# Allegro board rasp_pi_shield_populated.brd
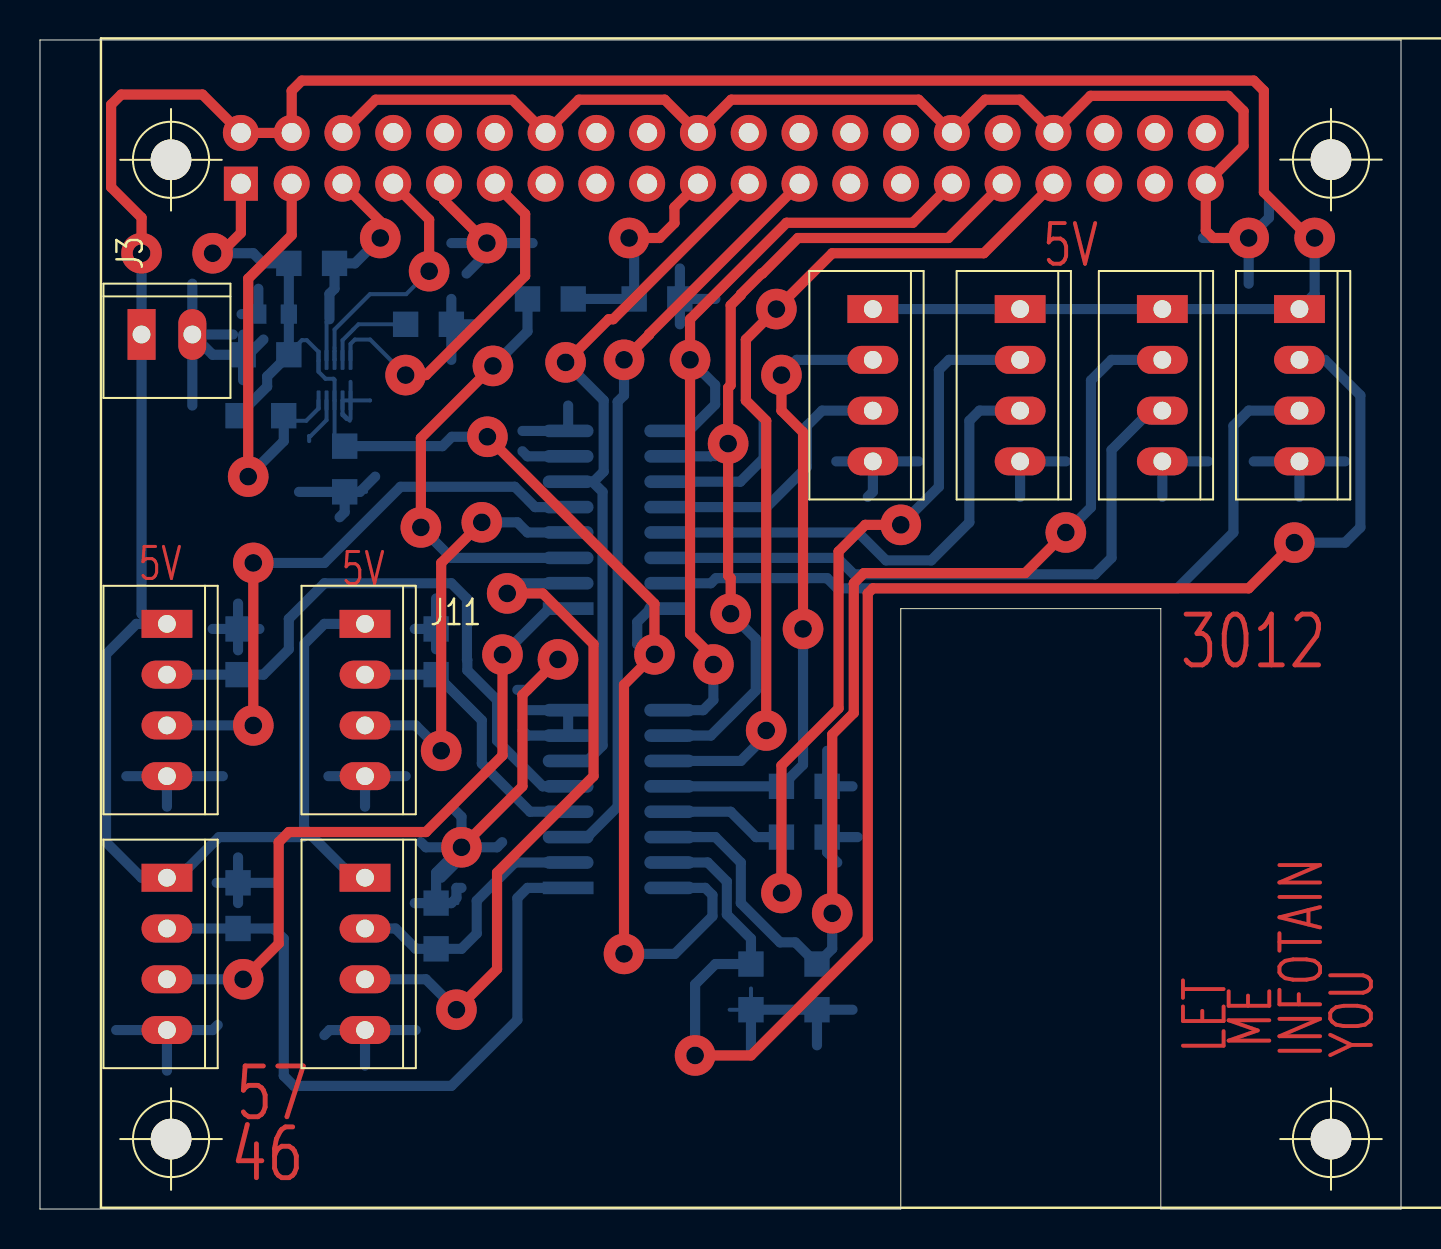
[diagram p0: board, top side]
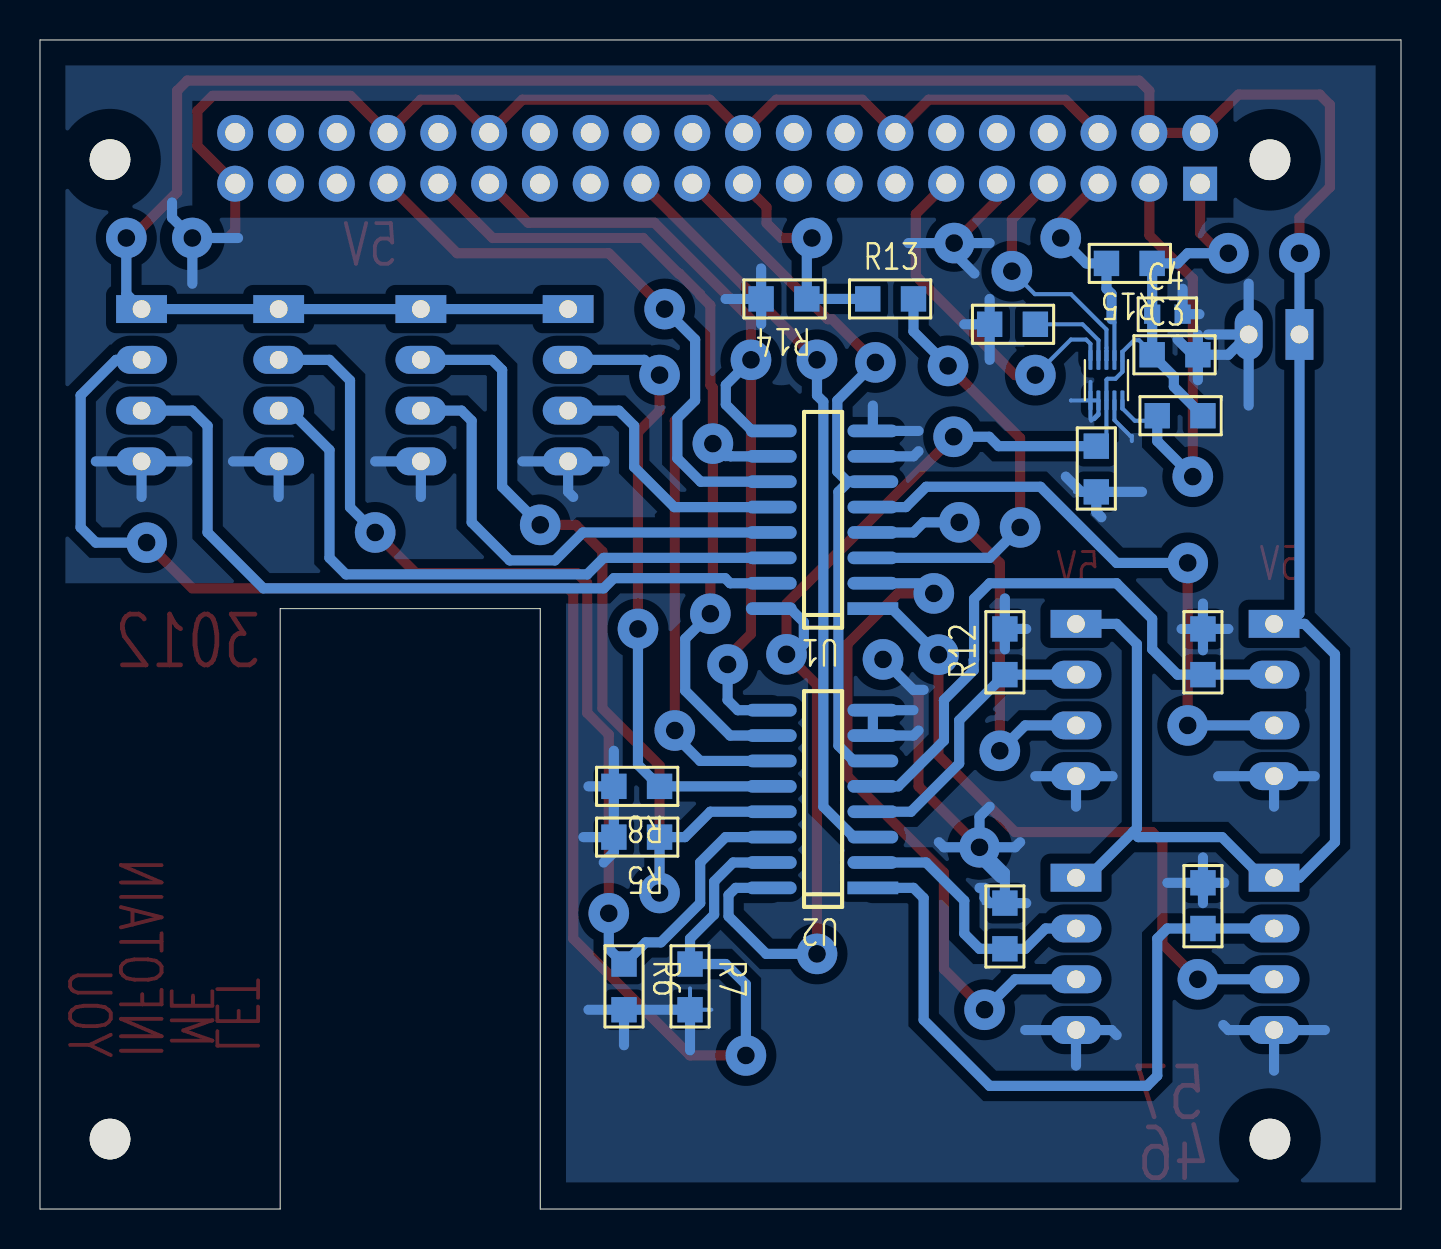
[diagram p1: board, bottom side, seen from below]

Outline 68.07 x 58.48 mm; copper layers: TOP, BOTTOM. Coordinates in mm from the lower left corner of the outline.
Outline path: 0,58.48 0,0 43.05,0 43.05,30.04 56.06,30.04 56.06,0 68.07,0 68.07,58.48 0,58.48

## Design rules (mm)
constraint set DEFAULT: min track width 0.198

## Placement (name value [footprint] x y rotation side)
C2  0.1u  [GU-C0805]  15.24 38.16 270 bottom
C3  0.1u  [GU-C0805]  12.45 42.74 180 bottom
C4  1u  [GU-C0603]  12.45 44.77 180 bottom
C5  0.1u  [GU-C0805]  18.29 44.26 0 bottom
J3  CONN FLEX 2  [GU-MOLEX2]  5.08 43.75 90 top
J4  CONN FLEX 4  [GU-MOLEX4]  49.02 45.02 0 top
J5  CONN FLEX 4  [GU-MOLEX4]  56.13 45.02 0 top
J6  CONN FLEX 4  [GU-MOLEX4]  62.99 45.02 0 top
J7  CONN FLEX 4  [GU-MOLEX4]  41.66 45.02 0 top
J8  CONN FLEX 4  [GU-MOLEX4]  6.35 16.57 0 top
J9  CONN FLEX 4  [GU-MOLEX4]  6.35 29.27 0 top
J10  CONN FLEX 4  [GU-MOLEX4]  16.26 16.57 0 top
J11  CONN FLEX 4  [GU-MOLEX4]  16.26 29.27 0 top
NOREF  -  [unnamed]  64.57 52.5 0 top
NOREF#2  -  [unnamed]  64.57 3.5 0 top
NOREF#3  -  [unnamed]  6.55 52.49 0 top
NOREF#4  -  [unnamed]  6.56 3.5 0 top
R5  10k  [GU-R0805]  37.08 18.61 0 bottom
R6  10k  [GU-R0805]  38.86 12.26 270 bottom
R7  10k  [GU-R0805]  35.56 12.26 270 bottom
R8  10k  [GU-R0805]  37.08 21.15 0 bottom
R9  10k  [GU-R0805]  9.91 14.03 90 bottom
R10  10k  [GU-R0805]  9.91 26.73 90 bottom
R11  10k  [GU-R0805]  19.81 13.02 90 bottom
R12  10k  [GU-R0805]  19.81 26.73 90 bottom
R13  1k  [GU-R0805]  26.67 45.53 180 bottom
R14  2k  [GU-R0805]  29.72 45.53 0 bottom
R15  1k  [GU-R0805]  12.45 47.31 0 bottom
R16  1k  [GU-R0805]  9.91 39.69 0 bottom
U1  4051  [GU-SOIC16]  26.42 30.04 90 bottom
U2  4051  [GU-SOIC16]  26.42 16.07 90 bottom
U3  RPI Connector  [GU-RASP-PI-3]  3.05 0.06 0 top
U4  MMA8652FCR1  [SON10P40_200X200X100L40X20]  14.73 41.47 0 bottom

## Library data of the parts
C2-C5 = C
J3 = CONN FLEX 2
J4-J11 = CONN FLEX 4
R5-R16 = R
U1 U2 = 4051_1
U3 = RPI Connector_2
U4 = MMA8652FCR1

## Footprints (pads in the part's own frame, mm; a bottom-side part is the same pattern mirrored in y, then rotated)
GU-C0603
  rect 0.813x0.965 smd: 1(0,0) 2(1.524,0)
GU-C0805
  rect 1.27x1.27 smd: 1(0,0) 2(2.286,0)
GU-MOLEX2
  rect 2.54x1.397 hole 0.889: 1(0,0)
  oval 2.54x1.397 hole 0.889: 2(0,-2.54)
GU-MOLEX4
  rect 2.54x1.397 hole 0.889: 1(0,0)
  oval 2.54x1.397 hole 0.889: 2(0,-2.54) 3(0,-5.08) 4(0,-7.62)
GU-R0805
  rect 1.27x1.27 smd: 1(0,0) 2(2.286,0)
GU-RASP-PI-3
  round 1 hole 3 unplated: (3.5,52.5) (3.5,3.5) (61.5,52.5) (61.5,3.5)
  rect 1.7x1.7 hole 1: 1(7,51.23)
  round 1.8 hole 1: 2(7,53.77) 3(9.54,51.23) 4(9.54,53.77) 5(12.08,51.23) 6(12.08,53.77) 7(14.62,51.23) 8(14.62,53.77) 9(17.16,51.23) 10(17.16,53.77) 11(19.7,51.23) 12(19.7,53.77) 13(22.24,51.23) 14(22.24,53.77) 15(24.78,51.23) 16(24.78,53.77) 17(27.32,51.23) 18(27.32,53.77) 19(29.86,51.23) 20(29.86,53.77) 21(32.4,51.23) 22(32.4,53.77) 23(34.94,51.23) 24(34.94,53.77) 25(37.48,51.23) 26(37.48,53.77) 27(40.02,51.23) 28(40.02,53.77) 29(42.56,51.23) 30(42.56,53.77) 31(45.1,51.23) 32(45.1,53.77) 33(47.64,51.23) 34(47.64,53.77) 35(50.18,51.23) 36(50.18,53.77) 37(52.72,51.23) 38(52.72,53.77) 39(55.26,51.23) 40(55.26,53.77)
GU-SOIC16
  rect 0.635x2.54 smd: 1(0,0)
  oval 0.635x2.54 smd: 2(1.27,0) 3(2.54,0) 4(3.81,0) 5(5.08,0) 6(6.35,0) 7(7.62,0) 8(8.89,0) 9(8.89,5.08) 10(7.62,5.08) 11(6.35,5.08) 12(5.08,5.08) 13(3.81,5.08) 14(2.54,5.08) 15(1.27,5.08) 16(0,5.08)
SON10P40_200X200X100L40X20
  rrect 0.2x1.1 smd: 1(-0.8,-0.965)
  rrect 0.2x1 smd: 2(-0.4,-1.015) 3(0,-1.015) 4(0.4,-1.015) 5(0.8,-1.015) 6(0.8,1.015) 7(0.4,1.015) 8(0,1.015) 9(-0.4,1.015) 10(-0.8,1.015)
unnamed
  round 2.032 hole 3.962 unplated: (0,0)

## Nets
3V3_: C2.1 C3.1 C4.1 R15.1 R16.1 U1.16 U2.16 U3.1 U4.1 U4.8(VDDIO)
5V_: J3.1 J4.1 J5.1 J6.1 J7.1 J8.1 J9.1 J10.1 J11.1 U3.2 U3.4
GND_: C2.2 C3.2 C4.2 C5.2 J3.2 J4.4 J5.4 J6.4 J7.4 J8.4 J9.4 J10.4 J11.4 R5.2 R6.2 R7.2 R8.2 R9.2 R10.2 R11.2 R12.2 R14.2 U1.7 U1.8 U2.7 U2.8 U3.6 U3.9 U3.14 U3.20 U3.30 U3.34 U3.39 U4.6 U4.7 U4.9
ACC_INT1: U3.7 U4.3
ACC_INT2: U3.11 U4.5
ACC_SCL: R15.2 U3.5 U4.2
ACC_SDA: R16.2 U3.3 U4.10
E0: J4.3 U1.13
E1: J5.3 U1.14
E2: J6.3 U1.15
E3: J7.3 U1.12
E4: J8.3 U1.1
E5: J9.3 U1.5
E6: J10.3 U1.2
E7: J11.3 U1.4(X7)
MUX_ECHO: R13.1 R14.1 U3.19
MUX_NEN: U1.6 U2.6 U3.21
MUX_S0: U1.11 U2.11 U3.33
MUX_S1: U1.10 U2.10 U3.31
MUX_S2: U1.9 U2.9 U3.29
MUX_TRIGGER: U2.3 U3.23
T0: J4.2 R5.1 U2.13
T1: J5.2 R6.1 U2.14
T2: J6.2 R7.1 U2.15
T3: J7.2 R8.1 U2.12
T4: J8.2 R9.1 U2.1
T5: J9.2 R10.1 U2.5
T6: J10.2 R11.1 U2.2
T7: J11.2 R12.1 U2.4(X7)
N001297: R13.2 U1.3
N26225: C5.1 U4.4

Pads without a net: U3 8 10 12 13 15 16 17 18 22 24 25 26 27 28 32 35 36 37 38 40

## Via types
v1: diameter 2.032, hole 0.889, TOP to BOTTOM, 41 vias

## Routing (per net, layer and track width the routed paths; a pad name or vN(x,y) marks a point on that pad's centre or on a via; arc(x,y) is an arc through that point)
3V3_: length 74.4
  TOP w0.508: v1(29.21,12.76) 29.21,26.23 v1(30.73,27.75) 30.73,30.28 v1(22.38,38.63) ; v1(8.64,47.82) 9.03,47.82 10.05,48.83 U3.1
  BOTTOM w0.198: U4.8 14.73,38.67 C2.1
  BOTTOM w0.203: U4.8 14.73,41.48 14.68,41.53 14.28,41.53 13.93,41.89 U4.1 13.93,42.88 13.35,43.46 13.1,43.46 12.45,42.81
  BOTTOM w0.508: U1.16 30.54,30.04 29.87,29.36 29.87,28.26 30.38,27.75 v1(30.73,27.75) ; U2.16 33.27,16.07 33.63,15.71 33.63,14.65 31.75,12.76 v1(29.21,12.76) ; C2.1 20.13,38.16 20.6,38.63 v1(22.38,38.63) ; R16.1 11.36,41.14 11.36,41.65 C3.1 C4.1 R15.1 11.18,47.31 10.67,47.82 v1(8.64,47.82)
5V_: length 163.4
  TOP w0.508: v1(5.08,47.82) 5.08,49.59 3.56,51.12 3.56,55.25 4.06,55.75 8.13,55.75 U3.2 U3.4 12.59,55.94 13.1,56.45 60.71,56.45 61.21,55.94 61.21,50.86 63.5,48.58 v1(63.75,48.58)
  BOTTOM w0.508: J10.1 15.68,16.57 13.4,18.86 ; v1(63.75,48.58) 63.75,45.78 J6.1 J5.1 J4.1 J7.1 ; 13.4,18.86 13.21,19.05 13.21,28.26 14.22,29.27 J11.1 ; 13.4,18.86 13.14,18.61 8.95,18.61 6.92,16.57 J8.1 5.08,16.57 3.3,18.35 3.3,27.75 4.83,29.27 5.59,29.27 ; J9.1 5.59,29.27 ; 5.59,29.27 5.08,29.78 J3.1 v1(5.08,47.82)
GND_: length 235.7
  TOP w0.508: v1(25.91,27.5) 24.13,25.72 24.13,21.15 v1(21.08,18.1) ; v1(60.45,48.58) 58.67,48.58 58.31,48.94 U3.39 60.2,53.18 60.2,54.93 59.44,55.69 52.54,55.69 U3.34 49.03,55.5 47.27,55.5 U3.30 43.95,55.5 34.57,55.5 U3.20 31.25,55.5 26.95,55.5 U3.14 23.63,55.5 16.79,55.5 U3.6 ; U3.9 20.21,50.47 v1(22.35,48.32)
  BOTTOM w0.198: 34.49,9.97 R7.2 35.56,11.04 ; U4.6 15.53,41.38 ; U4.6 15.53,39.52 ; U4.6 16.51,40.45 16.51,40.45 ; 20.88,15.3 20.57,15.3 ; 15.13,39.8 15.49,39.43 ; 16.31,35.88 16,35.88
  BOTTOM w0.203: U4.9 14.33,39.47 13.54,38.67 13.46,38.67 13.46,38.42 ; 15.34,39.52 15.13,39.72 U4.7 U4.6
  BOTTOM w0.508: v1(25.91,27.5) 24.38,25.97 23.88,25.97 ; 40.89,18.61 R5.2 ; R5.2 39.37,17.84 39.88,17.34 ; R5.2 R8.2 ; J8.4 8.64,8.95 8.89,9.21 ; J8.4 3.81,8.95 ; J8.4 6.35,6.92 ; C3.2 10.16,43.74 ; C3.2 10.16,41.47 ; C3.2 10.41,42.74 11.18,43.5 ; C3.2 8.64,42.74 J3.2 ; 24.64,48.32 v1(22.35,48.32) ; v1(22.35,48.32) 22.35,47.82 21.34,46.8 ; v1(22.35,48.32) 20.57,48.32 ; 35.56,7.94 R7.2 R6.2 ; 40.64,9.97 R6.2 ; R6.2 38.86,8.19 ; R14.2 32,44.26 ; R14.2 32,47.05 ; R14.2 33.78,45.53 ; J10.4 14.48,8.95 14.22,8.7 ; J10.4 18.8,8.95 ; J10.4 16.26,7.18 ; R9.2 8.84,16.32 ; R9.2 11.68,16.32 ; R9.2 9.91,15.3 ; R9.2 9.91,17.59 ; 19.81,30.54 R12.2 ; R12.2 19.81,28 ; R12.2 18.74,29.02 ; 39.37,22.92 R8.2 ; R8.2 40.64,21.15 ; 16.26,20.13 J11.4 ; J11.4 14.43,21.65 ; J11.4 18.29,21.65 ; 10.08,44.77 C4.2 10.92,46.04 ; v1(21.08,18.1) 19.81,16.83 R11.2 ; v1(21.08,18.1) 21.08,19.62 20.57,20.13 ; v1(21.08,18.1) 21.08,17.59 20.07,16.57 ; v1(21.08,18.1) 22.86,18.1 23.11,18.35 ; v1(21.08,18.1) 19.3,18.1 19.05,18.35 ; 7.62,46.29 J3.2 ; J3.2 7.62,40.2 ; J3.2 9.65,43.75 ; 20.57,45.53 C5.2 ; C5.2 21.84,44.26 ; C5.2 20.57,42.48 ; 65.28,37.4 J6.4 ; J6.4 60.71,37.4 ; J6.4 62.99,35.62 ; R11.2 18.74,15.3 ; R11.2 20.57,15.3 20.83,15.56 20.83,16.07 21.08,16.07 ; J7.4 39.83,37.4 ; J7.4 43.94,37.4 ; J7.4 41.66,35.88 41.4,35.62 ; v1(60.45,48.58) 60.45,46.29 ; v1(60.45,48.58) 58.17,48.58 ; v1(60.45,48.58) 61.47,49.59 61.47,50.36 ; 24.38,24.96 U2.8 U2.7 24.38,23.69 24.13,23.94 ; 4.32,21.65 J9.4 ; J9.4 9.14,21.65 ; J9.4 6.35,20.13 ; 16.76,36.64 16,35.88 C2.2 ; 24.13,38.93 U1.8 26.42,40.2 ; C2.2 15.24,34.86 14.99,34.61 ; C2.2 12.95,35.88 ; 49.02,35.62 J4.4 51.31,37.4 ; 9.91,30.29 R10.2 ; R10.2 8.64,29.02 ; R10.2 10.97,29.02 ; R10.2 9.91,27.95 ; 58.42,37.4 J5.4 56.13,35.62 ; U1.7 24.38,37.66 24.13,37.91
ACC_INT1: length 12.6
  TOP w0.508: v1(19.46,46.92) 19.46,49.5 U3.7
  BOTTOM w0.203: U4.3 14.73,42.48 14.73,42.93 14.73,43.08 14.73,44 16.51,45.77 18.31,45.77 v1(19.46,46.92)
ACC_INT2: length 17.7
  TOP w0.508: U3.11 24.27,49.78 24.27,46.68 19.3,41.72 v1(18.29,41.72)
  BOTTOM w0.203: v1(18.29,41.72) 16.51,43.5 15.75,43.5 15.53,43.28 U4.5
ACC_SCL: length 11.3
  TOP w0.508: U3.5 17.02,49.4 v1(17.02,48.58)
  BOTTOM w0.203: 14.48,44.51 14.33,44.37 U4.2
  BOTTOM w0.508: v1(17.02,48.58) 15.75,47.31 R15.2 14.73,46.04 14.48,45.78 14.48,44.51
ACC_SDA: length 21.8
  TOP w0.508: U3.3 12.59,48.72 10.41,46.55 v1(10.41,36.64)
  BOTTOM w0.203: U4.10 13.93,40.05 13.31,39.43 12.45,39.43 R16.2
  BOTTOM w0.508: v1(10.41,36.64) 12.19,38.42 R16.2
E0: length 24.2
  BOTTOM w0.508: U1.13 40.92,33.85 42.32,32.45 44.58,32.45 46.48,34.35 46.48,39.43 46.99,39.94 J4.3
E1: length 31.5
  BOTTOM w0.508: U1.14 39.88,32.58 40.7,31.75 52.77,31.75 53.59,32.58 53.59,37.97 55.56,39.94 J5.3
E2: length 38.6
  BOTTOM w0.508: U1.15 33.55,31.31 33.81,31.56 39.37,31.56 39.88,31.05 56.9,31.05 59.69,33.85 59.69,39.18 60.45,39.94 J6.3
E3: length 13.4
  BOTTOM w0.508: J7.3 39.12,39.94 38.35,39.18 38.35,37.12 36.35,35.12 U1.12
E4: length 33.7
  TOP w0.508: v1(10.16,11.49) 11.94,13.27 11.94,18.35 12.45,18.86 19.3,18.86 23.13,22.69 v1(23.13,27.73)
  BOTTOM w0.508: v1(10.16,11.49) J8.3 ; U1.1 25.46,30.04 23.79,28.37 23.77,28.37 v1(23.13,27.73)
E5: length 30.2
  TOP w0.508: v1(10.67,24.19) v1(10.67,32.32)
  BOTTOM w0.508: U1.5 24.77,35.12 23.75,36.13 18.03,36.13 14.22,32.32 v1(10.67,32.32) ; J9.3 v1(10.67,24.19)
E6: length 35
  TOP w0.508: v1(20.83,9.97) 22.86,12 22.86,16.83 27.69,21.65 27.69,28.26 25.15,30.8 v1(23.37,30.8)
  BOTTOM w0.508: J10.3 19.3,11.49 v1(20.83,9.97) ; U1.2 23.88,31.31 v1(23.37,30.8)
E7: length 21.1
  TOP w0.508: v1(22.1,34.35) 20.07,32.32 v1(20.07,22.92)
  BOTTOM w0.508: U1.4 24.38,33.85 23.88,34.35 v1(22.1,34.35) ; v1(20.07,22.92) 18.8,24.19 J11.3
MUX_ECHO: length 11.2
  TOP w0.508: v1(29.46,48.58) 30.99,48.58 31.73,49.32 31.73,50.12 U3.19
  BOTTOM w0.508: v1(29.46,48.58) 29.72,48.32 R14.1 R13.1
MUX_NEN: length 36.6
  TOP w0.508: U3.21 28.67,44.51 28.45,44.51 v1(26.29,42.35)
  BOTTOM w0.508: U2.6 27.37,22.42 28.14,23.19 28.14,35.88 27.63,36.39 ; 27.63,36.39 27.69,36.39 28.19,36.89 28.19,40.45 v1(26.29,42.35) ; 27.63,36.39 U1.6
MUX_S0: length 57.8
  TOP w0.508: U3.33 47.21,47.82 39.62,47.82 v1(36.83,45.02) 35.31,43.5 35.31,40.45 36.32,39.43 v1(36.32,23.94)
  BOTTOM w0.508: U1.11 35.03,36.39 36.2,37.55 36.2,39.56 35.31,40.45 35.31,43.5 v1(36.83,45.02) ; U2.11 35.05,22.42 36.07,23.43 36.07,23.69 v1(36.32,23.94)
MUX_S1: length 44.5
  TOP w0.508: v1(34.54,29.78) 34.54,31.56 34.42,31.69 v1(34.42,38.29) 34.42,41.08 34.54,41.21 34.54,45.21 35.05,45.72 35.05,45.76 36.09,46.8 36.13,46.8 37.91,48.58 45.43,48.58 U3.31
  BOTTOM w0.508: U1.10 33.53,37.66 33.54,37.67 33.79,37.67 v1(34.42,38.29) ; U2.10 33.55,23.69 35.8,25.93 35.8,28.52 v1(34.54,29.78)
MUX_S2: length 43.4
  TOP w0.508: U3.29 43.65,49.34 37.34,49.34 32.51,44.51 v1(32.51,42.48) 32.51,28.77 33.68,27.6 v1(33.68,27.24)
  BOTTOM w0.508: v1(32.51,42.48) 33.77,41.22 33.77,40.25 32.45,38.93 U1.9 ; U2.9 33.17,24.96 33.68,25.46 v1(33.68,27.24)
MUX_TRIGGER: length 38
  TOP w0.508: v1(29.21,42.48) 30.47,43.74 30.47,43.77 U3.23
  BOTTOM w0.508: v1(29.21,42.48) 29.21,40.7 28.89,40.39 28.89,20.13 27.37,18.61 U2.3
T0: length 43.6
  TOP w0.508: v1(37.08,15.81) 37.08,22.19 39.94,25.04 39.94,32.89 41.28,34.23 v1(43.05,34.23)
  BOTTOM w0.508: U2.13 34.54,19.88 35.81,18.61 R5.1 v1(37.08,15.81) ; J4.2 45.47,42.48 44.96,41.97 44.96,36.13 v1(43.05,34.23)
T1: length 54.8
  TOP w0.508: v1(51.31,33.85) 49.28,31.81 41.21,31.81 40.7,31.31 40.7,24.82 39.62,23.74 v1(39.62,14.8)
  BOTTOM w0.508: J5.2 53.59,42.48 52.57,41.45 52.57,35.1 v1(51.31,33.85) ; v1(39.62,14.8) 39.62,13.02 R6.1 37.78,13.34 37.02,13.34 35.05,15.3 35.05,17.34 33.78,18.61 U2.14
T2: length 79.4
  TOP w0.508: v1(32.77,7.68) 35.56,7.68 41.4,13.53 41.4,30.79 41.66,31.05 60.45,31.05 v1(62.74,33.34)
  BOTTOM w0.508: J6.2 64.26,42.48 66.04,40.7 66.04,34.1 65.28,33.34 v1(62.74,33.34) ; v1(32.77,7.68) 32.77,11.24 33.78,12.26 R7.1 35.56,13.53 34.35,14.73 34.35,16.38 33.4,17.34 U2.15
T3: length 31.9
  TOP w0.508: v1(38.16,29.02) 38.16,38.86 37.08,39.94 v1(37.08,41.72)
  BOTTOM w0.508: v1(37.08,41.72) 37.85,42.48 J7.2 ; v1(38.16,29.02) 38.16,22.22 R8.1 U2.12
T4: length 35
  BOTTOM w0.508: J8.2 R9.1 11.68,14.03 12.19,13.53 12.19,6.67 12.7,6.16 20.57,6.16 23.88,9.46 23.88,15.56 24.38,16.07 U2.1
T5: length 30.3
  BOTTOM w0.508: J9.2 R10.1 11.18,26.73 12.45,28 12.45,29.53 14.22,31.31 20.57,31.31 21.35,30.53 21.35,27.49 21.37,27.47 21.37,26.95 22.86,25.46 22.86,23.43 25.15,21.15 U2.5
T6: length 13.3
  BOTTOM w0.508: U2.2 23.75,17.34 21.84,15.43 21.84,13.78 21.08,13.02 R11.1 18.8,13.02 17.78,14.03 J10.2
T7: length 14.3
  BOTTOM w0.508: U2.4 24.51,19.88 22.1,22.29 22.1,24.45 R12.1 J11.2
N001297: length 21.6
  TOP w0.508: v1(19.05,34.1) 19.05,38.57 v1(22.66,42.18)
  BOTTOM w0.508: v1(22.66,42.18) 24.38,43.91 R13.2 ; U1.3 20.57,32.58 v1(19.05,34.1)
N26225: length 4.5
  BOTTOM w0.198: 15.67,44.01 15.93,44.26 C5.1
  BOTTOM w0.203: U4.4 15.13,43.46 15.67,44.01

## Copper pours and planes (outline as drawn; the poured copper is in the pictures)
GND_ on BOTTOM: 1.27,57.21 66.8,57.21 66.8,31.31 41.76,31.31 41.76,1.33 1.27,1.33 ; 24 cut-outs

## Text on the board
TOP: 5V | LET | ME | INFOTAIN | YOU | 46 | 57 | 3012
